# Altium PCB PCB1.PcbDoc
Units mm, origin at the board's own origin, x right, y up, seen from the top; angles counter-clockwise.
Board outline 29 x 29 mm, 2 copper layers (Top Layer, Bottom Layer), stack 1.671 mm thick; 36 components, 25 nets, 116 pads, 49 vias.
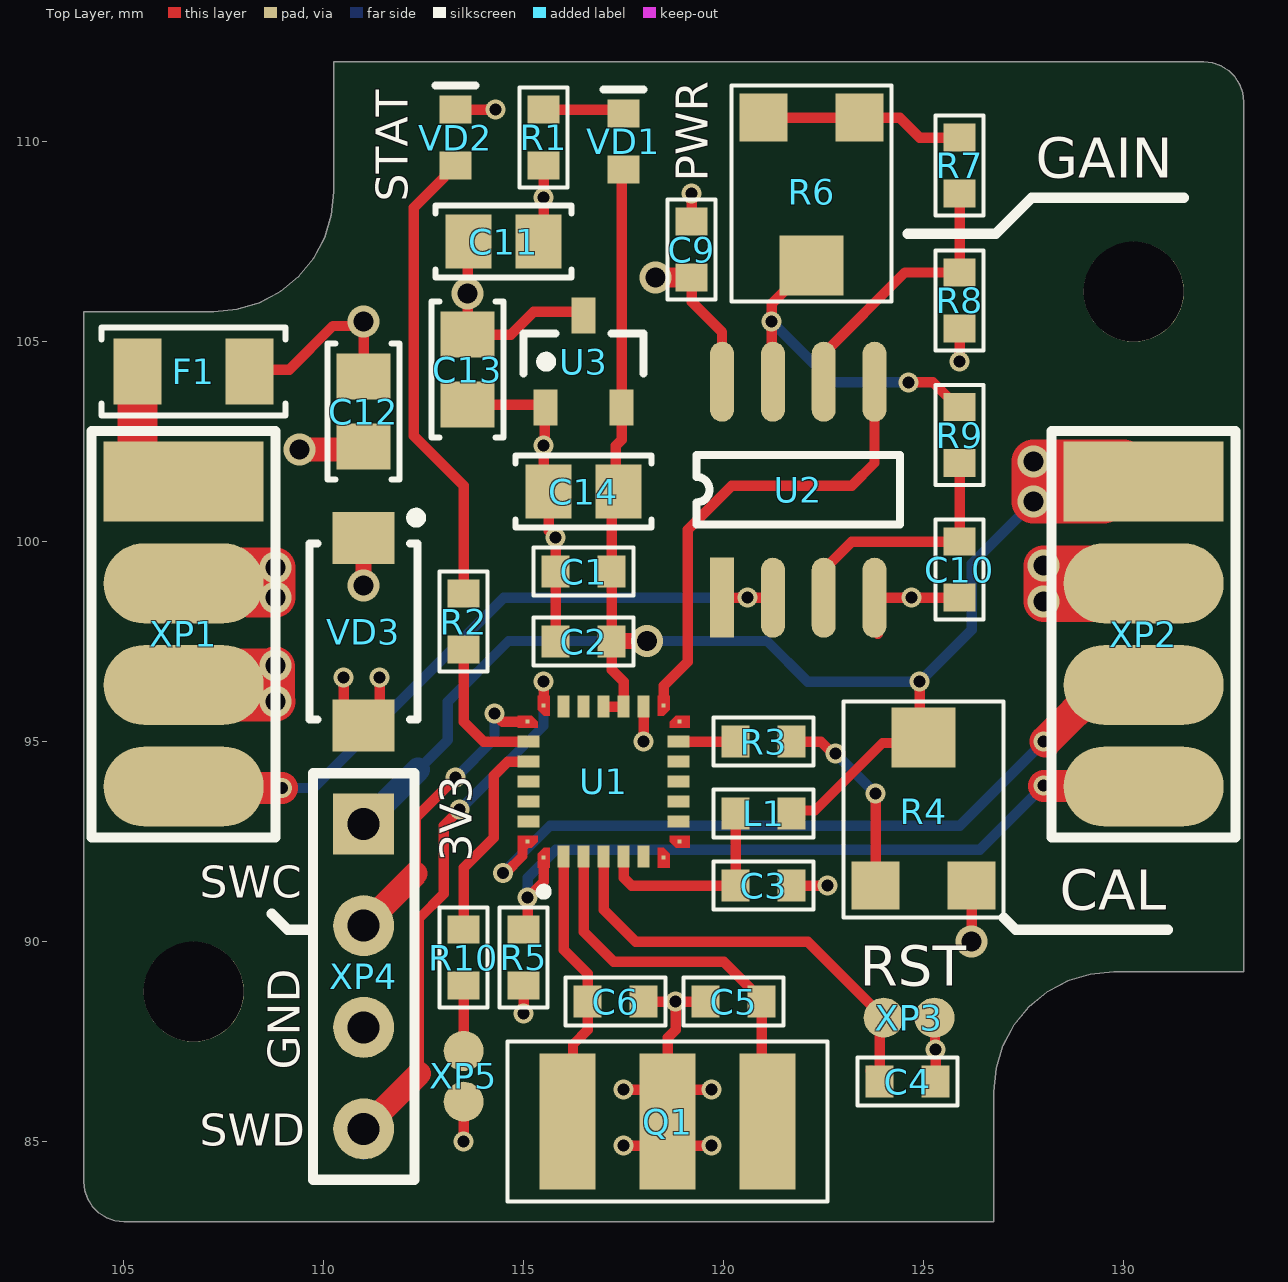
[diagram p0: Top Layer view]
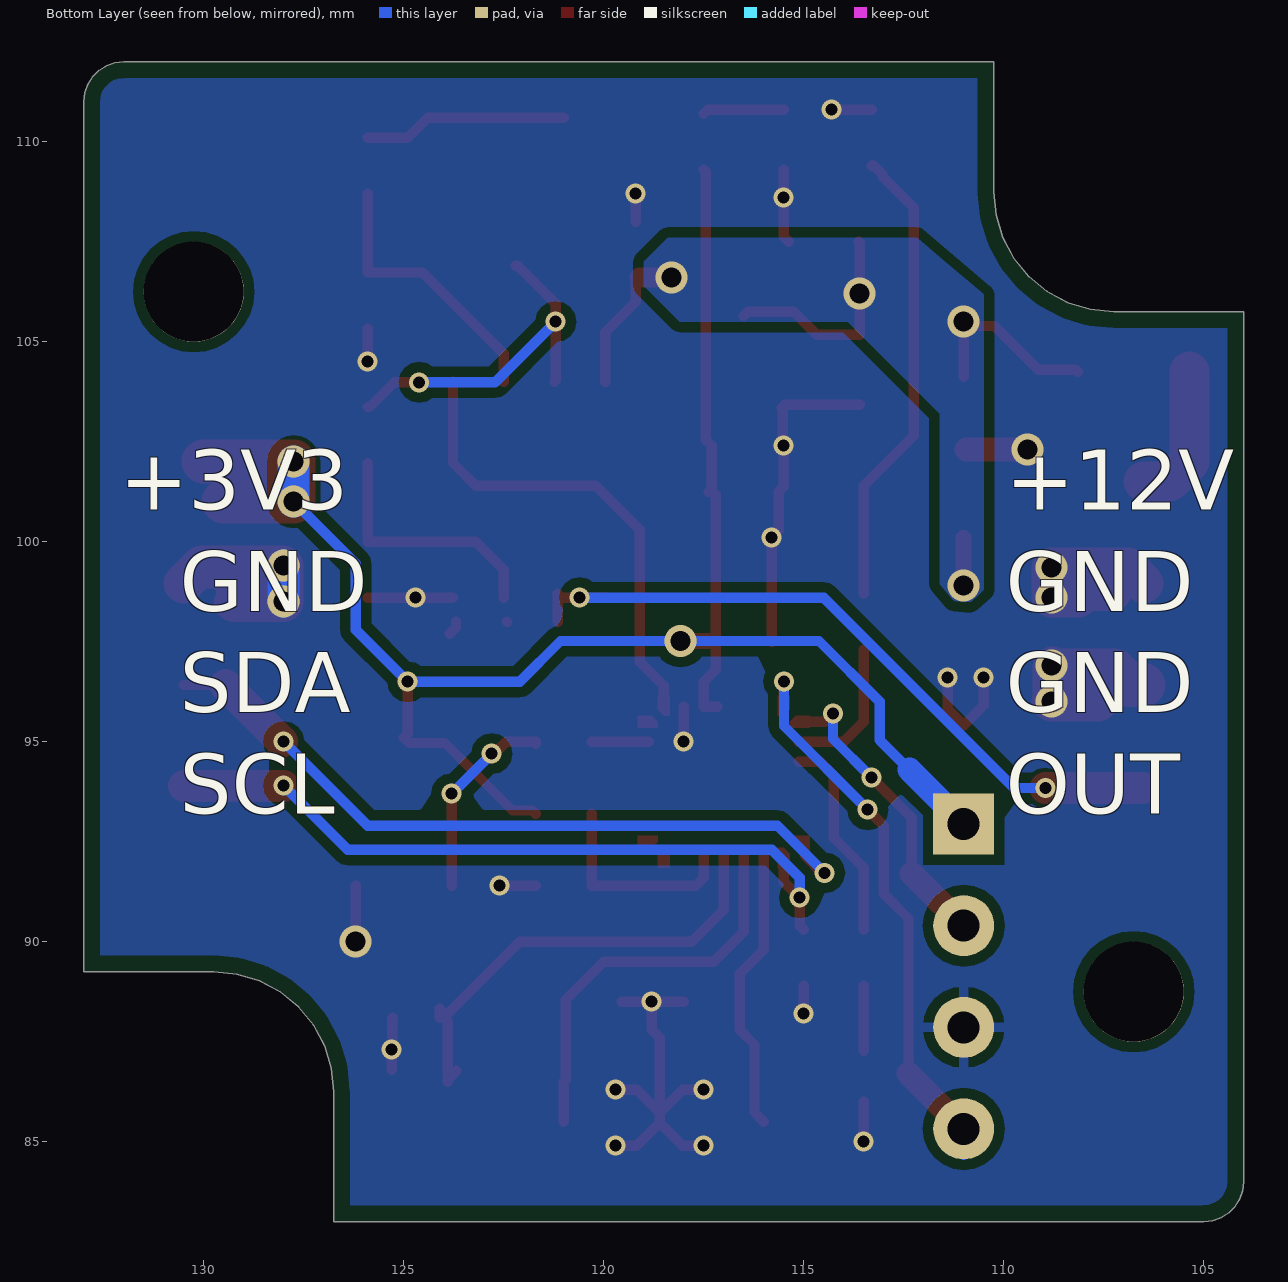
[diagram p1: Bottom Layer view, seen from below]
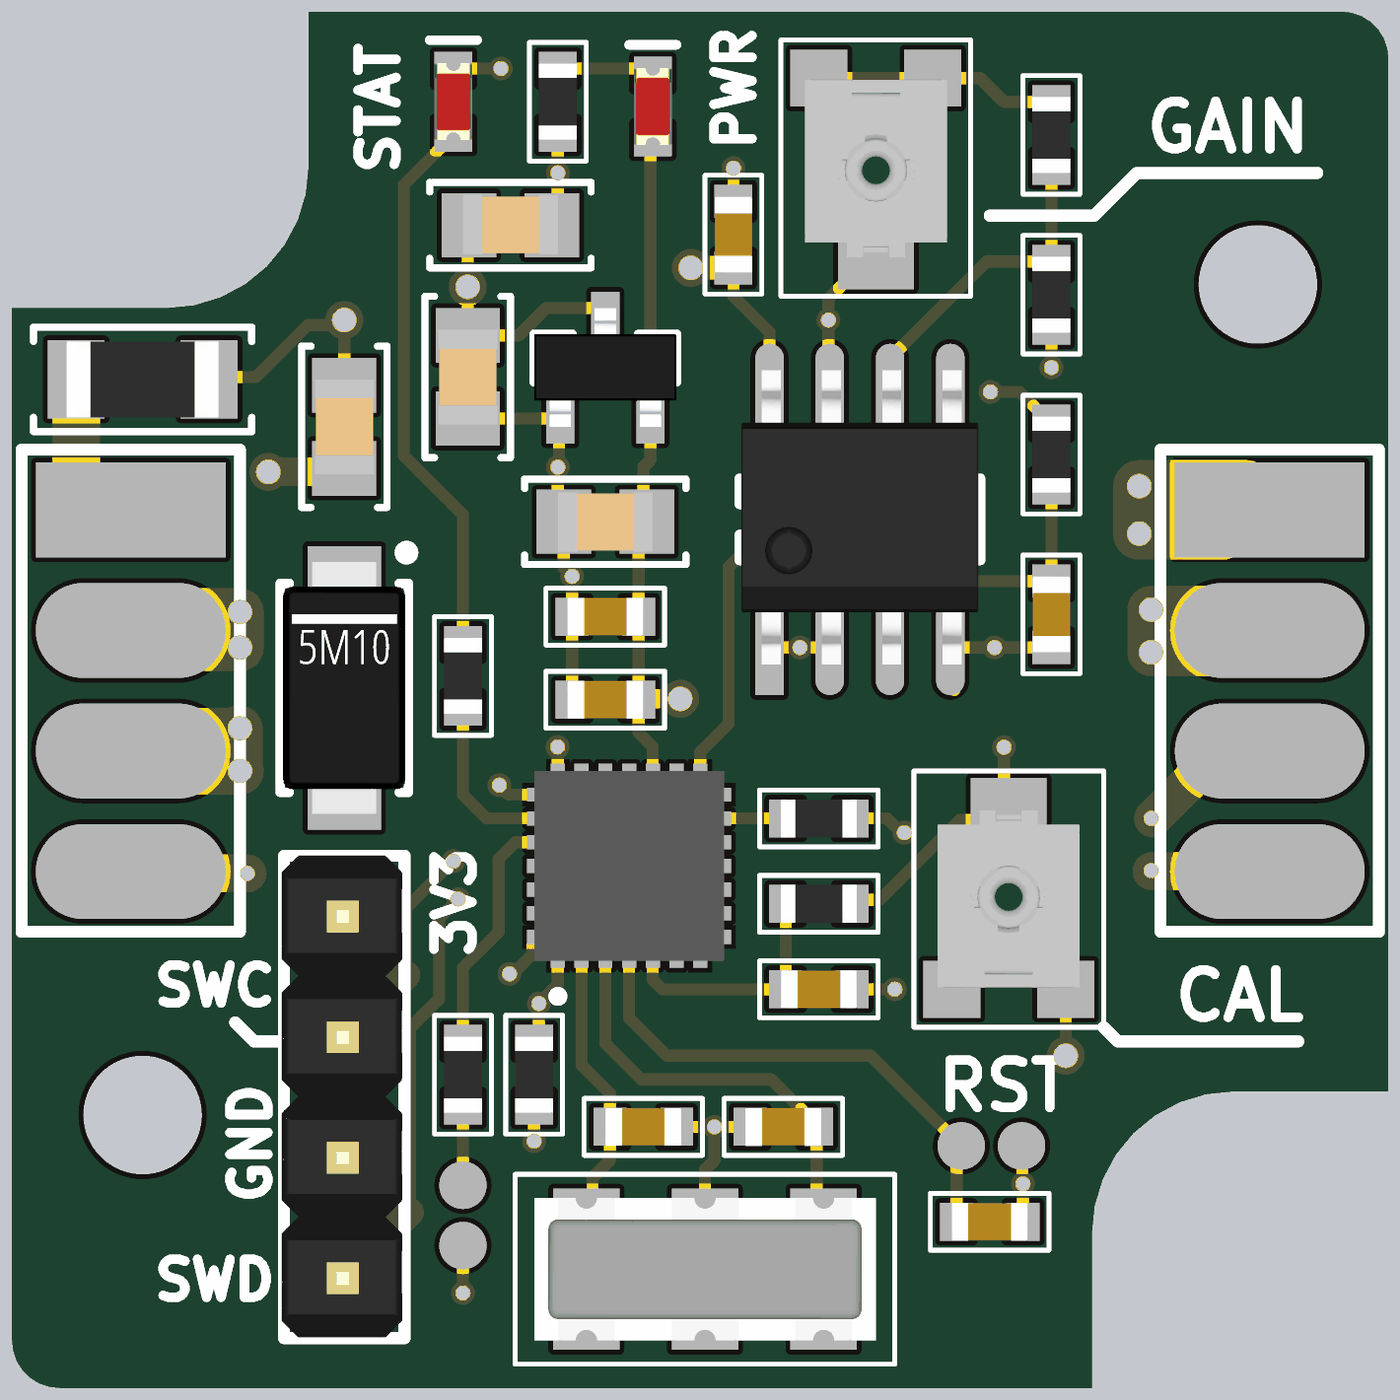
[diagram p2: 3D render of the assembled board from above, using the file's embedded part models]

## Layer stack, top to bottom
Top Solder: solder mask 0.0102, Solder Resist, Dk 3.5
Top Layer: signal copper 0.0356
Dielectric 1: dielectric 1.6, FR-4, Dk 4.8
Bottom Layer: signal copper 0.0356
Bottom Solder: solder mask 0.0102, Solder Resist, Dk 3.5

## Board outline
110.25,112 110.25,108.75 110.192,108.165 110.022,107.602 109.744,107.083 109.371,106.629 108.917,106.256 108.398,105.978 107.835,105.808 107.25,105.75 104,105.75 104,84 104.025,83.777 104.099,83.566 104.218,83.377 104.376,83.218 104.566,83.099 104.777,83.025 105,83 126.75,83 126.75,86.25 126.808,86.835 126.978,87.398 127.256,87.917 127.629,88.371 128.083,88.744 128.602,89.022 129.165,89.192 129.75,89.25 133,89.25 133,111 132.975,111.223 132.901,111.434 132.782,111.623 132.623,111.782 132.434,111.901 132.223,111.975 132,112

## Design rules (kind name [scope] priority, off if disabled: settings)
BoardOutlineClearance [All] p1: gap=0.254 ignorepadtopadclearanceinfootprint=FALSE except(0: Arc-SplitContinuation Track-SplitContinuation SMDPad-SplitContinuation THPad-SplitContinuation Via-SplitContinuation Fill-SplitContinuation Poly-SplitContinuation Region-SplitContinuation Text-SplitContinuation; 0.4: Poly-OutlineEdge)
Clearance [All] p1: gap=0.254 ignorepadtopadclearanceinfootprint=TRUE except(0: Arc-Hole Track-Hole SMDPad-Hole Via-Hole Fill-Hole Region-Hole Text-Hole; 0.2: Arc-Arc Arc-Track Track-Track SMDPad-SMDPad; 0.25: Poly-Hole)
PolygonConnect PolygonConnect_3 [All vs IsNamedPolygon('+12V_L02_P000')] p1: connectstyle=Direct reliefconductorwidth=0.254 reliefentries=4 polygonreliefangle="90 Angle" airgapwidth=0.254
PolygonConnect [All vs IsNamedPolygon('GND_L02_P001')] p2: thpad.connectstyle=Relief thpad.reliefconductorwidth=0.25 thpad.reliefentries=4 thpad.polygonreliefangle="90 Angle" thpad.airgapwidth=0.25 smdpad.connectstyle=Relief smdpad.reliefconductorwidth=0.254 smdpad.reliefentries=4 smdpad.polygonreliefangle="90 Angle" smdpad.airgapwidth=0.254 via.connectstyle=Direct via.reliefconductorwidth=0.254 via.reliefentries=4 via.polygonreliefangle="90 Angle" via.airgapwidth=0.254
RoutingVias [All] p1: holewidth=0.3 width=0.5 viastyle="Through Hole" minholewidth=0.3 minwidth=0.5 maxholewidth=0.5 maxwidth=0.8
SolderMaskExpansion [All] p1: expansion=0.102 istentingtop=FALSE
Width [All] p1: maxlimit=0.254 minlimit=0.254 preferedwidth=0.254
30 further rules are at their usual default settings.

## Classes and differential pairs
component class Power: C11 C12 C13 C14 F1 U3 VD3
component class MCU: C1 C2 C3 C4 C5 C6 L1 Q1 R1 R2 R3 R4 R5 R10 U1 VD1 VD2 XP3 XP4 XP5
component class PWM_TO_ADC: C9 C10 R6 R7 R8 R9 U2
component class Connectors: XP1 XP2

## Components (designator, comment, footprint, x,y, rotation, side; value= is the part's Value field where it differs from the comment)
C1 "0.1" CAP_0603 116.5,99.25 r180 top
C2 "0.1" CAP_0603 116.5,97.5 r180 top
C3 "0.1" CAP_0603 121,91.4 r0 top
C4 "0.1" CAP_0603 124.6,86.5 r180 top
C5 "22p" CAP_0603 120.25,88.5 r180 top
C6 "22p" CAP_0603 117.3,88.5 r0 top
C9 "0.1" CAP_0603 119.2,107.3 r90 top
C10 "1u" CAP_0603 125.9,99.3 r270 top
C11 "0.33" CAP_0805 114.5,107.5 r0 top
C12 "0.1" CAP_0805 111,103.25 r270 top
C13 "0.1" CAP_0805 113.6,104.3 r270 top
C14 "0.1" CAP_0805 116.5,101.25 r180 top
F1 "500mA" SMD_1206 106.75,104.25 r180 top
L1 "" SMD_0603 121,93.2 r0 top
Q1 "8MHz" CSTCC-CRYSTAL 118.6,85.5 r0 top
R1 "100k" SMD_0603 115.5,110.1 r270 top
R2 "1k" SMD_0603 113.5,98 r90 top
R3 "" SMD_0603 121,95 r180 top
R4 "" RES-ADJ-SMD-Panasonic 125,93 r0 top
R5 "100k" SMD_0603 115,89.6 r90 top
R6 "3223J-1-102E" RES-ADJ-SMD-Panasonic 122.2,109 r180 top
R7 "22k" SMD_0603 125.9,109.4 r270 top
R8 "10k" SMD_0603 125.9,106.033 r270 top
R9 "10k" SMD_0603 125.9,102.667 r90 top
R10 "330" SMD_0603 113.5,89.6 r90 top
U1 "STM32F042G6U6" UFQFPN_4x4_STM32F042G6U6 117,94 r90 top
U2 "LM358" SO8-150mil 119.96,98.6 r90 top
U3 "MCP1703AT-3302E/CB" SOT23-3 116.5,104.5 r90 top
VD1 "RED" LED_0603 117.5,110 r270 top
VD2 "GREEN" LED_0603 113.3,110.1 r270 top
VD3 "SMA6F12A" DO-221AC 111,97.75 r270 top
XP1 "CAM" HEAD-SMD-2.54/4 106.5,101.5 r0 top locked
XP2 "TEMP_SR" HEAD-SMD-2.54/4 130.5,101.5 r0 top locked
XP3 "RST" HEAD_MICRO_SF_1.27-2 125.27,88.1 r180 top
XP4 "CON_4" HEAD-1/4/2.54 111,92.94 r0 top
XP5 "CON_2" HEAD_MICRO_SF_1.27-2 113.5,87.27 r270 top

## Footprints (in the part's own frame and the unit in brackets; to place one, negate y for a bottom-side part, rotate by r counter-clockwise, add the part's x,y. Pads: shape width x height; smd on the part's side, far side on the other; paste and mask are expansions set on the pad)
CAP_0603 [mm]
  rect 0.7x0.8 smd: 1(-0.7,0) 2(0.7,0)
  silkscreen extent -1.25,-0.6 1.25,0.6, body extent -0.8,-0.4 0.8,0.4, height 0.9
CAP_0805 [mm] "Chip smd, 2-Leads, Body 2.00x1.25mm, IPC Medium Density"
  rect 1.15x1.35 smd: 1(-0.875,0) 2(0.875,0)
  silkscreen extent -1.7,-0.9 1.7,0.9, body extent -1,-0.62 1,0.63, height 0.95
CSTCC-CRYSTAL [mm]
  rect 1.4x3.4 smd: 1(-2.5,0) 2(0,0) 3(2.5,0)
  silkscreen extent -4,-2 4,2, body extent -3.6,-1.5 3.6,1.5, height 1.25
DO-221AC [mm] "SODFL, 2-Leads, Body 2.60x5.20mm, IPC Medium Density"
  rect 1.3x1.55 smd: 1(-2.34,0) 2(2.34,0)
  silkscreen extent -2.97,-1.35 2.2,1.44, body extent -2.65,-1.29 2.65,1.29, height 0.9
HEAD-1/4/2.54 [mil]
  rect 60x60 hole 31.5: 1(0,0)
  round 60 hole 31.5: 2(0,-100) 3(0,-200) 4(0,-300)
  silkscreen extent -50,-350 50,50, body extent -52,-350 48,50, height 366
HEAD-SMD-2.54/4 [mm]
  rect 4x2 smd: 1(0,0)
  oval 4x2 smd: 2(0,-2.54) 3(0,-5.08) 4(0,-7.62)
  silkscreen extent -2.3,-8.89 2.3,1.27
HEAD_MICRO_SF_1.27-2 [mm]
  round 1 smd: 1(0,0) 2(1.27,0)
LED_0603 [mm]
  rect 0.7x0.8 smd: 1(-0.7,0) 2(0.7,0)
  silkscreen extent -1.3,-0.5 -1.3,0.5, body extent -0.81,-0.4 0.81,0.4, height 0.6
RES-ADJ-SMD-Panasonic [mm]
  rect 1.2x1.2 smd: 1(-1.2,-1.6) 3(1.2,-1.6)
  rect 1.6x1.5 smd: 2(0,2.1)
  silkscreen extent -2,-2.4 2,3, body extent -1.5,-1.57 1.5,2.17, height 1.31
SMD_0603 [mm]
  rect 0.7x0.8 smd: 1(-0.7,0) 2(0.7,0)
  silkscreen extent -1.25,-0.6 1.25,0.6, body extent -0.8,-0.4 0.8,0.4, height 0.45
SMD_1206 [mm] "Chip smd, 2-Leads, Body 3.13x1.55mm, IPC Medium Density"
  rect 1.2x1.65 smd: 1(-1.4,0) 2(1.4,0)
  silkscreen extent -2.3,-1.1 2.3,1.1, body extent -1.6,-0.8 1.6,0.8, height 0.6
SO8-150mil [mm]
  rect 2x0.6 smd: 1(0,0)
  oval 2x0.6 smd: 2(0,-1.27) 3(0,-2.54) 4(0,-3.81) 5(5.4,-3.81) 6(5.4,-2.54) 7(5.4,-1.27) 8(5.4,0)
  silkscreen extent 1.84,-4.44 3.56,0.64, body extent -0.36,-4.41 5.84,0.6, height 1.75
SOT23-3 [mm]
  rect 0.9x0.6 smd: 1(-1.15,0.95) 2(-1.15,-0.95) 3(1.15,0)
  silkscreen extent -0.3,-1.5 0.7,1.5, body extent -1.25,-1.5 1.25,1.5, height 1.05
UFQFPN_4x4_STM32F042G6U6 [mm]
  rect 0.1x0.1 smd paste-1 mask+0: 1(-1.9,1.5) 7(-1.9,-1.5) 8(-1.5,-1.9) 14(1.5,-1.9) 15(1.9,-1.5) 21(1.9,1.5) 22(1.5,1.9) 28(-1.5,1.9)
  rect 0.55x0.3 smd: 2(-1.875,1) 3(-1.875,0.5) 4(-1.875,0) 5(-1.875,-0.5) 6(-1.875,-1) 16(1.875,-1) 17(1.875,-0.5) 18(1.875,0) 19(1.875,0.5) 20(1.875,1)
  rect 0.3x0.55 smd: 9(-1,-1.875) 10(-0.5,-1.875) 11(0,-1.875) 12(0.5,-1.875) 13(1,-1.875) 23(1,1.875) 24(0.5,1.875) 25(0,1.875) 26(-0.5,1.875) 27(-1,1.875)
  Top Layer region: -1.35,1.65 -1.5,1.65 -1.65,1.8 -1.65,2.15 -1.35,2.15
  Top Layer region: 1.65,1.8 1.5,1.65 1.35,1.65 1.35,2.15 1.65,2.15
  Top Layer region: 2.15,1.35 1.65,1.35 1.65,1.5 1.8,1.65 2.15,1.65
  Top Layer region: 2.15,-1.65 1.8,-1.65 1.65,-1.5 1.65,-1.35 2.15,-1.35
  Top Layer region: 1.65,-1.8 1.65,-2.15 1.35,-2.15 1.35,-1.65 1.5,-1.65
  Top Layer region: -1.35,-2.15 -1.65,-2.15 -1.65,-1.8 -1.5,-1.65 -1.35,-1.65
  Top Layer region: -1.65,-1.5 -1.8,-1.65 -2.15,-1.65 -2.15,-1.35 -1.65,-1.35
  Top Layer region: -1.65,1.5 -1.65,1.35 -2.15,1.35 -2.15,1.65 -1.8,1.65
  silkscreen extent -2.85,1.4 -2.65,1.6, body extent -2,-2 2,2, height 0.6

## Part data
C1 C2 C3 C4 C5 C6: library part C_NONE_POLAR, "None polar capacitor", Case=0603
C9 C10 C11 C12 C13 C14: library part C_NONE_POLAR, "None polar capacitor", Case=0805
F1: library part FUSE, "Resistor"
L1: library part FB, "Ferrite Bread"
Q1: library part CRYSTAL_CAP, "Crystal oscillator", Model=CSTCC8M00G53A-R0
R1 R2 R5: library part RES, "Resistor", Case=0603
R3 R8 R10: library part RES, "Resistor"
R4 R6: library part RES_ADJ, "Agjustable resistor"
R7 R9: library part RES, "Resistor", Case=0805
U1: "ARM Cortex-M0 STM32F0 Microcontroller IC 32-Bit 48MHz 32KB x 8kB FLASH 28-UFQFPN _4x4_", Package="UFQFN-28 STMicroelectronics", Availability=Unavailable, MF=STMicroelectronics, MP=STM32F042G6U6, Price=None, SnapEDA_Link=https://www.snapeda.com/parts/STM32F042G6U6/STMicroelectronics/view-part/225452/?ref=snap
U2: "OpAmp", Case=SOIC-8, Manufacture=TI, HelpURL=http://www.ti.com/lit/ds/symlink/lm158-n.pdf, Model=LM358
U3: library part MCP1703A, "250 mA, 16V, Low Quiescent Current LDO Regulator"
VD1 VD2: library part LED, "LED"
VD3: library part DIOSE_TVS, "TVS Diode"
XP1 XP2: library part CON_4
XP3: library part CON_2

## Free pads (board coordinates)
  round 2.5 hole 2.5 unplated: MH1(106.75,88.75) MH2(130.25,106.25)

## Via types
v1: diameter 0.5, hole 0.3, Top Layer to Bottom Layer, tented both sides, 34 vias
v2: diameter 0.8, hole 0.5, Top Layer to Bottom Layer, tented both sides, 15 vias

## Nets (pads, with @x,y where several pads share a name; then routed paths per layer and width w, separated by ;. In a path a pad name is that pad's centre, name@x,y a point inside that pad or via, vN(x,y) a via of type N, cw(c..) or ccw(c..) an arc to the next point about the centre after c; other vN are vias at no path point)
+3V3: C1.1 C2.1 C14.1 L1.2 R4.2 U1.17 U1.18 U3.2 VD1.2 XP2.1 XP4.1 | length 48.8
  Top Layer w0.254: 117.156,95.875 U1.17 117.5,96.5 117.2,96.8 C2.1 ; C14.1@117.2,101.175 C1.1 C2.1 ; C2.1@117.219,97.519 C2.1 ; C14.1 117.3,101.325 117.3,102.4 117.45,102.55 U3.2 117.45,109.25 VD1.2 ; L1.2 121.782,93.282 122.282,93.282 123.968,94.968 124.868,94.968 R4.2 124.9,95.2 v1(124.9,96.5)
  Top Layer w0.4: C2.1@117.219,97.519 v2(118.077,97.519)
  Top Layer w1.1: XP2.1@129.5,101 v2(127.75,101) v2(127.75,102) XP2.1@130,102
  Bottom Layer w0.254: 112.36,94.3 113.1,95.04 113.1,96 114.619,97.519 v2(118.077,97.519) 121.081,97.519 122.1,96.5 v1(124.9,96.5) 126.2,97.8 126.2,99.45 v2(127.75,101)
  Bottom Layer w0.6: XP4.1 112.36,94.3
  Bottom Layer w0.8: v2(127.75,101) v2(127.75,102)
+12V: C9.1 C11.1 C12.1 C13.1 F1.1 U2.8 U3.3 VD3.1 | length 15.2
  Top Layer w0.254: F1.1 108.2,104.3 109.138,104.3 110.233,105.396 110.896,105.396 v2(111,105.5) C12.1 ; C11.1 113.6,107.475 v2(113.6,106.2) C13.1 114.675,105.175 115.25,105.75 116.4,105.75 U3.3 ; C9.1 119.2,106 119.96,105.24 U2.8
  Top Layer w0.4: v2(111,98.9) VD3.1
  Top Layer w0.5: v2(118.3,106.6) C9.1@119.1,106.6
ADC_IN7: R3.2 U1.13 | length 1.4
  Top Layer w0.254: U1.13 R3.2
AVDD: C3.1 L1.1 U1.5 | length 5.2
  Top Layer w0.254: U1.5 117.5,91.6 117.7,91.4 C3.1 L1.1
BTN_CAL: R10.2 U1.24 | length 5.2
  Top Layer w0.254: R10.2 113.5,91.85 114.25,92.6 114.25,94.15 114.6,94.5 U1.24
GND: C1.2 C2.2 C3.2 C4.1 C5.2 C6.2 C9.2 C10.2 C11.2 C12.2 C13.2 C14.2 Q1.2 R1.2 R4.3 R5.1 R8.2 U1.16 U2.4 U3.1 VD2.1 VD3.2 XP1.2 XP1.3 XP2.2 XP3.1 XP4.3 XP5.2 | length 53.3
  Top Layer w0.254: XP1.2@107.29,99.04 107.6,99.35 XP1.2@107.753,99.503 ; v1(110.5,96.6) 110.5,95.91 VD3.2 111.4,95.81 v1(111.4,96.6) ; C12.2@110.925,102.3 C12.2 ; VD2.1 v1(114.3,110.8) ; v1(113.5,85) XP5.2 ; C13.2 115.475,103.425 U3.1 115.525,103.325 115.525,102.425 v1(115.5,102.4) 115.5,101.375 C14.2 115.625,100.275 v1(115.8,100.1) C2.2 ; v1(115,88.2) R5.1 ; C11.2 115.5,107.625 v1(115.5,108.6) R1.2@115.5,109.3 ; v1(117.5,84.9) 118.027,84.9 Q1.2@118.6,85.473 ; v1(117.5,86.3) 118.027,86.3 Q1.2@118.6,85.727 ; C6.2 v1(118.8,88.5) ; v1(118,95) U1.16 ; C9.2 v1(119.2,108.7) ; C5.2 v1(118.8,88.5) ; v1(119.7,84.9) 119.173,84.9 Q1.2@118.6,85.473 ; v1(119.7,86.3) 119.173,86.3 Q1.2@118.6,85.727 ; C3.2 v1(122.6,91.4) ; U2.4@123.695,97.995 123.69,98 123.69,97.86 U2.4@123.85,97.7 ; U2.4 v1(124.7,98.6) C10.2 ; XP3.1 125.285,88.085 125.285,87.315 v1(125.3,87.3) C4.1@125.3,86.8 ; v1(125.9,104.5) R8.2 ; v2(126.2,90) R4.3 ; v2(128,98.5) v2@128.047,98.547 ; XP2.2@129.247,98.497 129.71,98.96 130.06,98.96 XP2.2 ; Q1.2@118.6,85.473 Q1.2 Q1.2@118.6,85.727 ; Q1.2@118.6,85.727 118.6,87.6 118.8,87.8 v1(118.8,88.5) ; v2@108.604,96.9 108.8,97.192 v2(108.8,96.9) v2@108.604,96.9
  Top Layer w0.6: v2(109.4,102.3) C12.2@110.925,102.3
  Top Layer w1: XP1.2 106.89,99.35 107.6,99.35 v2(108.8,99.35) v2(108.8,98.6) 108.131,98.6 107.962,98.769 107.309,98.769 XP1.2@107.29,98.75 ; XP1.3@107.648,96 v2(108.8,96) ; v2@108.78,96.02 v2@108.78,96.88 ; v2(128,98.5) 128,99.25 v2(128,99.4) 130.06,99.4 XP2.2 ; v2@128.003,98.497 XP2.2@129.247,98.497
  Top Layer w1.1: XP1.3 106.863,96.42 106.863,96.422 106.901,96.46 107.223,96.783 v2@108.683,96.783
  Bottom Layer w0.8: v2(128,98.5) v2(128,99.4)
I2C1_SCL: R5.2 U1.1 XP2.4 | length 18.9
  Top Layer w0.254: R5.2 115.1,90.4 v1(115.1,91.1) 115.5,91.5 U1.1 ; v1(128,93.9) v1@128.01,93.89 ; XP2.4@130.49,93.89 XP2.4
  Top Layer w0.8: v1@128.01,93.89 XP2.4@130.49,93.89
  Bottom Layer w0.254: v1(115.1,91.1) 115.1,91.6 115.8,92.3 126.4,92.3 v1(128,93.9)
I2C1_SDA: U1.28 XP2.3 | length 19
  Top Layer w0.254: v1(114.481,91.724) 114.548,91.724 114.969,92.145 114.969,92.358 115.1,92.489 U1.28 ; v1(128,95) v1@128.04,95 ; XP2.3@129.46,96.42 XP2.3
  Top Layer w0.8: v1@128.04,95 XP2.3@129.46,96.42
  Bottom Layer w0.254: v1(114.481,91.724) 115.658,92.9 125.9,92.9 v1(128,95)
LED1: R2.1 U1.23 | length 3.6
  Top Layer w0.254: R2.1 113.5,95.5 114,95 U1.23
NetC10_1: C10.1 R9.1 U2.3 | length 6.4
  Top Layer w0.254: U2.3@122.41,97.99 U2.3@122.42,98 ; U2.3 122.5,99.3 123.2,100 C10.1 R9.1
NetR1_1: R1.1 VD1.1 | length 2
  Top Layer w0.254: R1.1 117.4,110.8 VD1.1
NetR2_2: R2.2 VD2.2 | length 11.7
  Top Layer w0.254: VD2.2 113.25,109.4 113.027,109.177 113.027,109.127 112.25,108.35 112.25,102.65 113.5,101.4 R2.2
NetR3_1: R3.1 R4.1 | length 5
  Top Layer w0.254: R3.1@121.7,94.95 R3.1 122.433,95 122.733,94.7 v1(122.8,94.7) ; R4.1 v1(123.8,93.7)
  Bottom Layer w0.254: v1(122.8,94.7) v1(123.8,93.7)
NetR6_1: R6.1 R6.3 R7.1 | length 5.1
  Top Layer w0.254: R6.3 R6.1 124.4,110.6 124.9,110.1 R7.1
NetR6_2: R6.2 R9.2 U2.7 | length 8.9
  Top Layer w0.254: U2.7 121.2,104.03 v1(121.2,105.5) 121.2,105.95 122.15,106.9 R6.2 ; v1(124.614,103.986) 125.231,103.986 125.85,103.367 R9.2
  Bottom Layer w0.254: v1(121.2,105.5) 122.714,103.986 v1(124.614,103.986)
NetR7_2: R7.2 R8.1 U2.6 | length 6.9
  Top Layer w0.254: U2.6 122.5,104.7 124.533,106.733 R8.1 R7.2
NetR10_1: R10.1 XP5.1 | length 1.6
  Top Layer w0.254: XP5.1 R10.1
NetU2_1: U2.1 U2.2 XP1.4 | length 17.9
  Top Layer w0.254: XP1.4 XP1.4@106.54,93.84 ; U2.1 121.07,98.6 121.15,98.68 U2.2@121.15,98.7 ; U2.2@121.15,98 U2.2@121.15,98.6
  Top Layer w0.8: XP1.4@106.54,93.84 v1(108.96,93.84)
  Bottom Layer w0.254: v1(108.96,93.84) 109.74,93.84 114.5,98.6 v1(120.6,98.6)
NRST: C4.2 U1.4 XP3.2 | length 11.5
  Top Layer w0.254: U1.4 117,90.8 117.8,90 120.5,90 122.1,90 XP3.2 123.9,88 C4.2@123.9,86.65 ; C4.2@123.677,86.773 123.9,86.55 C4.2 ; XP3.2@124.1,88.1 XP3.2@124.1,88.33
OSC_IN: C6.1 Q1.1 U1.2 | length 7.1
  Top Layer w0.254: Q1.1@116,85.5 116.232,85.732 116.232,87.432 116.6,87.8 C6.1 116.6,89.2 116,89.8 U1.2
OSC_OUT: C5.1 Q1.3 U1.3 | length 10.1
  Top Layer w0.254: U1.3 116.5,90.25 117.25,89.5 120,89.5 120.95,88.55 C5.1 120.95,86.55 121,86.5 Q1.3@121,85.5
SWC: U1.22 XP4.2 | length 7.6
  Top Layer w0.254: 112.3,91.7 112.3,93.1 v1(113.3,94.1) ; v1(114.267,95.7) 114.467,95.5 U1.22
  Top Layer w0.6: XP4.2 112.3,91.7
  Bottom Layer w0.254: v1(113.3,94.1) 114.267,95.067 v1(114.267,95.7)
SWD: U1.21 XP4.4 | length 14.1
  Top Layer w0.254: 112.38,86.7 112.38,90.58 113,91.2 113,92.9 v1(113.4,93.3) ; v1(115.494,96.506) 115.5,96.5 U1.21
  Top Layer w0.6: XP4.4 112.38,86.7
  Bottom Layer w0.254: XP4.4@111,84.67 XP4.4@111.325,84.995 ; XP4.4 XP4.4@111.02,85.32 ; v1(113.4,93.3) 115.494,95.394 v1(115.494,96.506)
TIM1_CH4_PWM: U1.15 U2.5 | length 12
  Top Layer w0.254: U1.15 118.5,96.4 119.1,97 119.1,100.3 120.2,101.4 123.2,101.4 123.77,101.97 U2.5
VCC: F1.2 XP1.1 | length 3.6
  Top Layer w1: F1.2 105.35,102 105.85,101.5 XP1.1
pads on no net: U1.6 U1.7 U1.8 U1.9 U1.10 U1.11 U1.12 U1.14 U1.19 U1.20 U1.25 U1.26 U1.27

## Polygon pours and split planes (outlines as drawn)
GND on Bottom Layer "GND_L02_P001" (solid, remove dead copper, pour order 1): 104,112 104,83 133,83 133,112
+12V on Bottom Layer "+12V_L02_P000" (solid, pour order 0): 110.5,106.182 110.5,98.8 110.8,98.5 111.3,98.5 111.6,98.938 111.6,103.2 113.9,105.5 118.1,105.5 119,106.4 119,107 118.398,107.602 112.174,107.602

## Silkscreen, mask and mechanical layers (free items; w line width, h text height)
Top Overlay:
  lines w0.254: 108.7,90.7 109.1,90.3 109.7,90.3 ; 124.6,107.7 126.8,107.7 127.7,108.6 131.5,108.6 ; 127,90.6 127.3,90.3 131.1,90.3
  text "GAIN" at 127.8,109.1 h1
  text "PWR" at 119.6,109 h0.8 r90
  text "STAT" at 112.1,108.5 h0.8 r90
  text "3V3" at 113.7,92 h0.8 r90
  text "SWC" at 106.9,91.1 h0.8
  text "CAL" at 128.4,90.8 h1
  text "RST" at 123.4,88.9 h1
  text "GND" at 109.4,86.8 h0.8 r90
  text "SWD" at 106.9,84.9 h0.8
Bottom Overlay:
  text "+12V" at 109.95,100.8 h1.5
  text "+3V3" at 132.1,100.8 h1.5
  text "GND" at 109.95,98.267 h1.5
  text "GND" at 130.6,98.267 h1.5
  text "GND" at 109.95,95.733 h1.5
  text "SDA" at 130.6,95.733 h1.5
  text "OUT" at 109.95,93.2 h1.5
  text "SCL" at 130.6,93.2 h1.5
Board Outline:
  the board outline again, w0.2